# Altium PCB MC3PHAC.PcbDoc
Units mm, origin at the board's own origin, x right, y up, seen from the top; angles counter-clockwise.
Board outline 110.36 x 81.66 mm, 2 copper layers (Top Layer, Bottom Layer); 60 components, 0 nets, 193 pads, 18 vias.
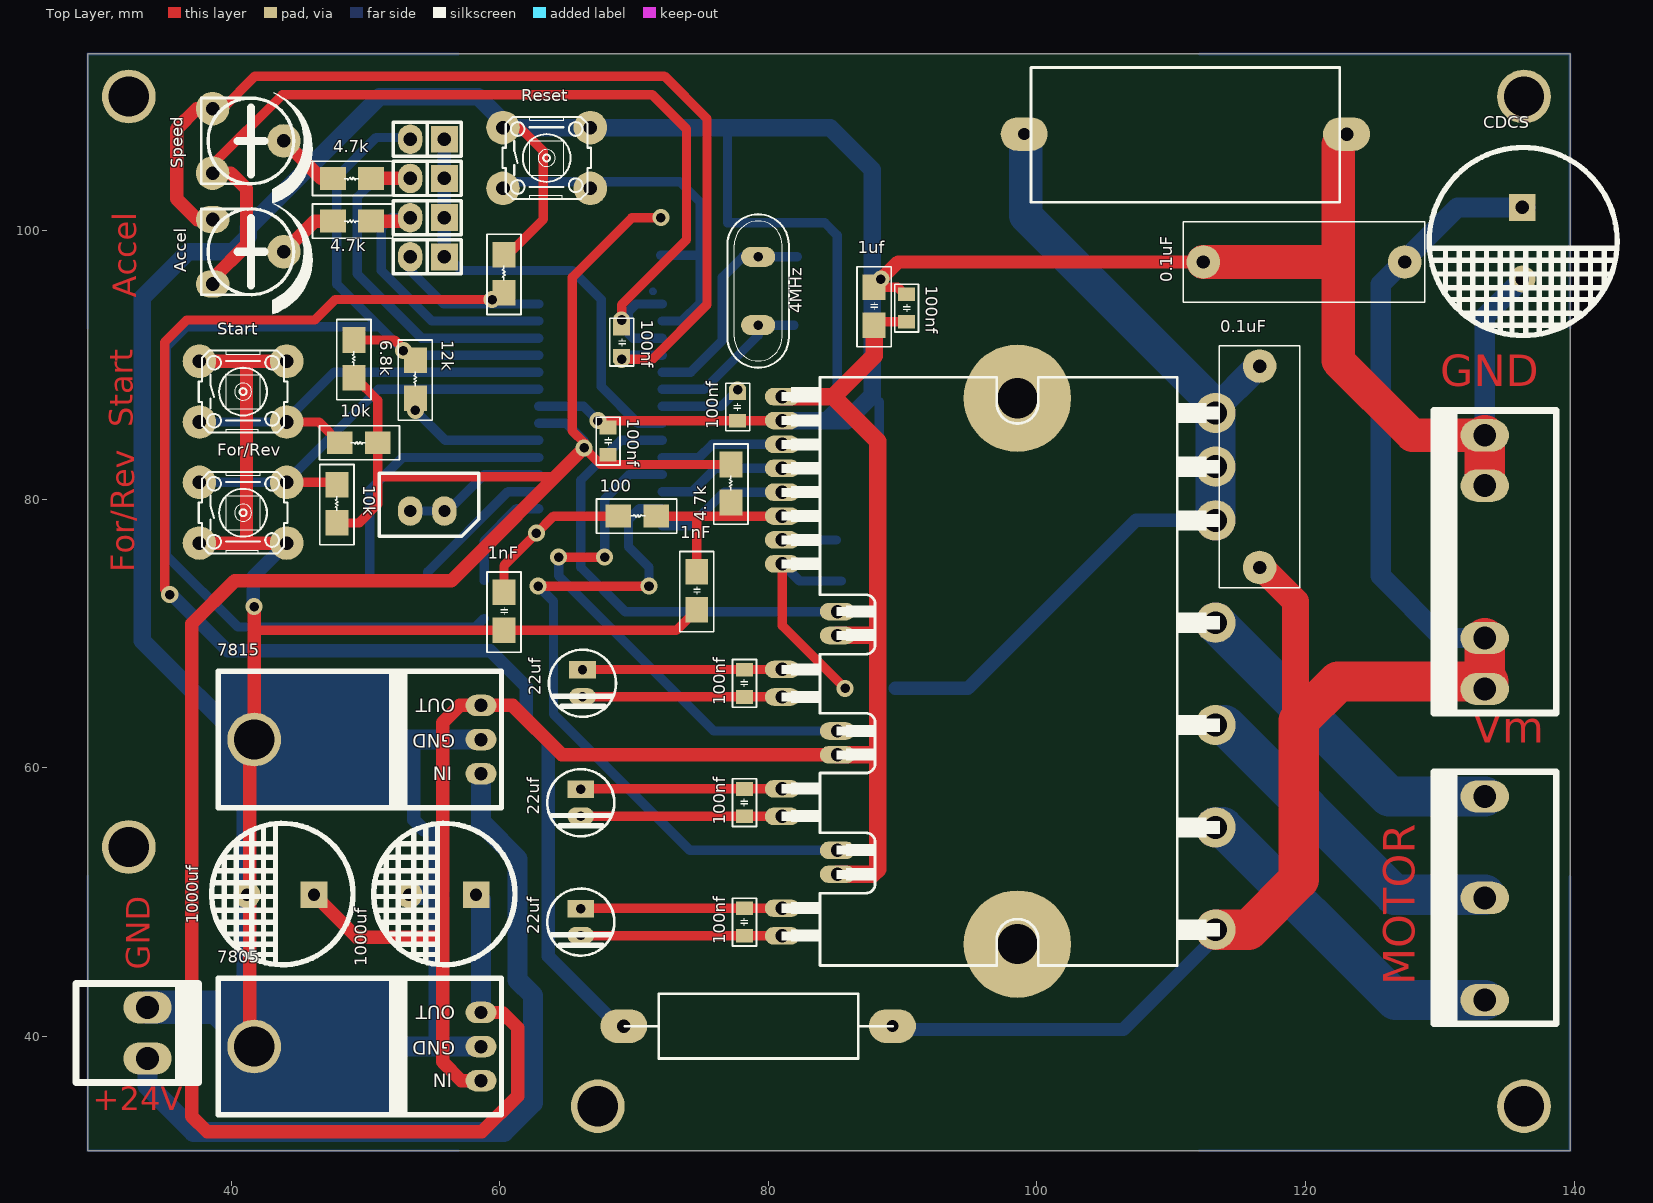
[diagram p0: Top Layer view]
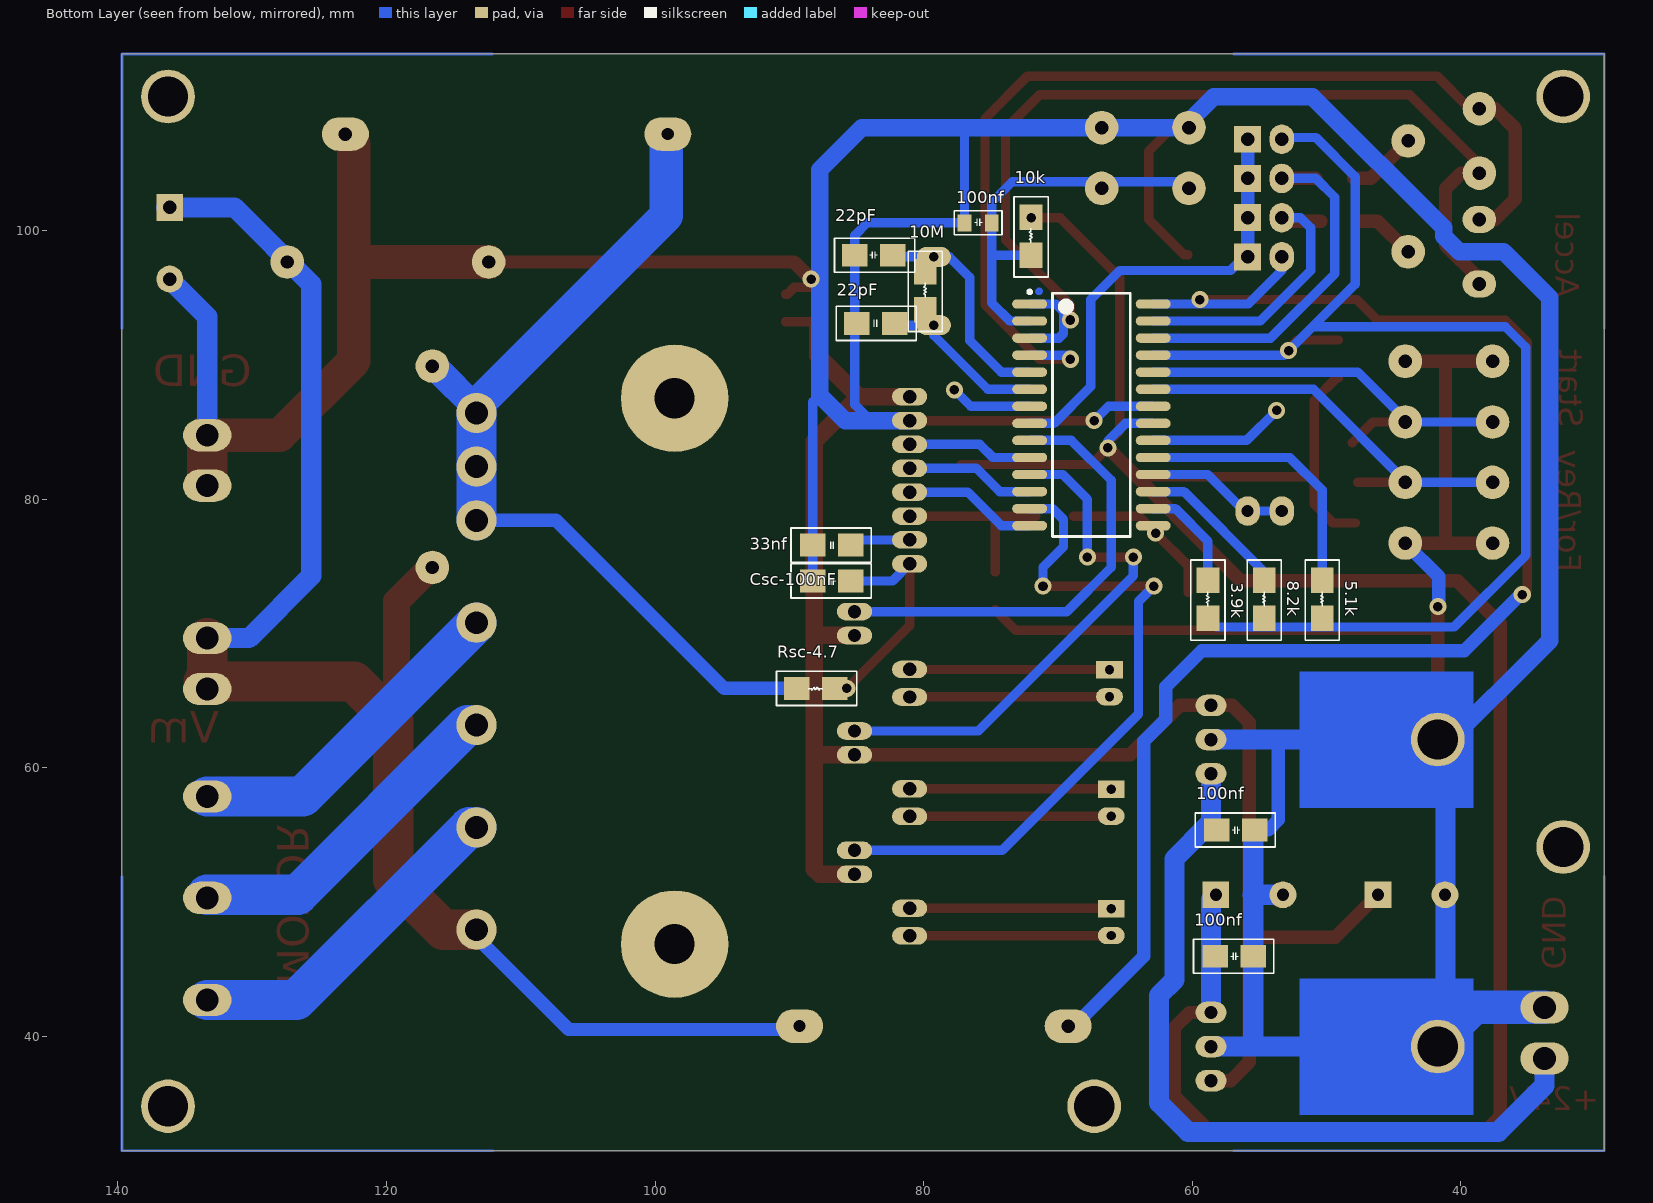
[diagram p1: Bottom Layer view, seen from below]

## Layer stack, top to bottom
Top Solder: solder mask 0.0102, Solder Resist, Dk 3.5
Top Layer: signal copper 0.0356
Dielectric 1: dielectric 0.32, FR-4, Dk 4.8
Bottom Layer: signal copper 0.0356
Bottom Solder: solder mask 0.0102, Solder Resist, Dk 3.5

## Board outline
29.337,31.496 29.337,113.157 139.7,113.157 139.7,31.496

## Design rules (kind name [scope] priority, off if disabled: settings)
Clearance [All] p1: gap=0.254
PolygonConnect [All] p1: connectstyle=Relief reliefconductorwidth=0.254 reliefentries=4 polygonreliefangle="90 Angle" airgapwidth=0.254
RoutingVias [All] p1: holewidth=0.711 width=1.27 viastyle="Through Hole" minholewidth=0.711 minwidth=1.27 maxholewidth=0.711 maxwidth=1.27
SolderMaskExpansion [All] p1: expansion=0.102
Width [All] p1: maxlimit=0.254 minlimit=0.254 preferedwidth=0.254
29 further rules are at their usual default settings.

## Components (designator, comment, footprint, x,y, rotation, side; value= is the part's Value field where it differs from the comment)
0.1uF "Comment" "CAP POL 15mm" 112.395,97.663 r0 top
0.1uF "Comment" "CAP POL 15mm" 116.586,89.916 r270 top
1nF "Comment" "CAP SMD 0805 & 1206" 60.325,70.231 r90 top
1nF "Comment" "CAP SMD 0805 & 1206" 74.676,71.755 r90 top
1uf "Comment" "CAP SMD 0805 & 1206" 87.884,92.964 r90 top
3.9k "Comment" "Res SMD 0805 & 1206" 58.841,71.12 r270 bottom
4.7k "Comment" "Res SMD 0805 & 1206" 77.216,79.756 r270 top
4.7k "Comment" "Res SMD 0805 & 1206" 50.419,100.711 r0 top
4.7k "Comment" "Res SMD 0805 & 1206" 50.419,103.886 r0 top
4MHz "Comment" XTAL 79.248,95.504 r90 top
5.1k "Comment" "Res SMD 0805 & 1206" 50.332,71.12 r270 bottom
6.8k "Comment" "Res SMD 0805 & 1206" 49.149,89.027 r270 top
8.2k "Comment" "Res SMD 0805 & 1206" 54.65,71.12 r270 bottom
10k "Comment" "Res SMD 0805 & 1206" 47.879,78.232 r270 top
10k "Comment" "Res SMD 0805 & 1206" 50.927,84.201 r0 top
10k "Comment" "Res SMD 0805 & 1206" 72.009,98.171 r270 bottom
10M "Comment" "Res SMD 0805 & 1206" 79.883,94.107 r270 bottom
12k "Comment" "Res SMD 0805 & 1206" 53.721,87.503 r270 top
22pF "Comment" "CAP SMD 0805 & 1206" 82.296,98.171 r0 bottom
22pF "Comment" "CAP SMD 0805 & 1206" 82.169,93.091 r0 bottom
22uf "Comment" "CAP 5MM" 66.167,66.294 r90 top
22uf "Comment" "CAP 5MM" 66.04,57.404 r90 top
22uf "Comment" "CAP 5MM" 66.04,48.514 r90 top
33nf "Comment" "CAP SMD 0805 & 1206" 88.265,76.581 r180 bottom
100 "Comment" "Res SMD 0805 & 1206" 68.834,78.74 r180 top
100nf "Comment" "CAP SMD 0805" 68.072,83.312 r90 top
100nf "Comment" "CAP SMD 0805" 78.232,67.31 r270 top
100nf "Comment" "CAP SMD 0805" 78.232,58.42 r270 top
100nf "Comment" "CAP SMD 0805" 78.232,49.53 r270 top
100nf "Comment" "CAP SMD 0805 & 1206" 58.166,55.372 r180 bottom
100nf "Comment" "CAP SMD 0805 & 1206" 58.293,45.974 r180 bottom
100nf "Comment" "CAP SMD 0805" 74.93,100.584 r0 bottom
100nf "Comment" "CAP SMD 0805" 77.724,87.884 r270 top
100nf "Comment" "CAP SMD 0805" 69.088,90.678 r90 top
100nf "Comment" "CAP SMD 0805" 90.297,93.218 r90 top
1000uf "Comment" "CAP 10MM" 43.688,50.546 r90 top
1000uf "Comment" "CAP 10MM" 55.753,50.546 r90 top
7805 "Comment" REG-SLEEP 50.165,39.243 r0 top
7815 "Comment" REG-SLEEP 50.165,62.103 r0 top
Accel "Comment" POT#1 41.275,98.425 r270 top
CDCS "Comment" "CAP 14MM" 136.144,99.06 r180 top
Csc-100nF "Comment" "CAP SMD 0805 & 1206" 88.265,73.914 r180 bottom
For/Rev "Comment" SW-4PIN-Small 40.894,78.994 r0 top
Reset "Comment" SW-4PIN-Small 63.5,105.41 r0 top
Rsc-4.7 "Comment" "Res SMD 0805 & 1206" 86.614,65.913 r180 bottom
Speed "Comment" POT#2 41.275,106.68 r270 top
Start "Comment" SW-4PIN-Small 40.894,88.011 r0 top
? "Comment" "RES 5W" 99.06,107.188 r0 top
? "Comment" "PIN PWR 5" 133.35,50.292 r90 top
? "Comment" "PIN PWR 6" 133.35,75.311 r90 top
? "Comment" "PIN PWR 2" 33.782,40.259 r270 top
? "Comment" "Pin gerd 2pin" 54.61,79.121 r270 top
? "Comment" "RES 2W" 79.248,40.767 r180 top
? "Comment" "Res SMD 0805 & 1206" 60.325,95.377 r270 top
? "Comment" FSBB30CH60C 97.155,67.564 r0 top
? "Comment" MC3PHAC(SOIC-28) 67.464,86.233 r180 bottom
? "Comment" "HEADER 2" 55.88,106.807 r0 top
? "Comment" "HEADER 2" 55.88,103.886 r0 top
? "Comment" "HEADER 2" 55.88,100.965 r0 top
? "Comment" "HEADER 2" 55.88,98.044 r0 top

## Footprints (in the part's own frame and the unit in brackets; to place one, negate y for a bottom-side part, rotate by r counter-clockwise, add the part's x,y. Pads: shape width x height; smd on the part's side, far side on the other; paste and mask are expansions set on the pad)
"CAP 5MM" [mm]
  oval 1.3x2 hole 0.7: 1(-1,0)
  rect 1.3x2 hole 0.7: 2(1,0)
  silkscreen extent -2.5,-2.5 2.5,2.5
"CAP 10MM" [mm] "CAP"
  rect 2x2 hole 0.9: +(0,-2.5)
  round 2 hole 0.9: -(0,2.5)
  silkscreen extent -5.21,-5.39 5.32,5.13
"CAP 14MM" [mm]
  rect 2x2 hole 1: +(0,-2.667)
  round 2 hole 1: -(0,2.667)
  silkscreen extent -7.07,-7.13 6.93,6.87
"CAP POL 15mm" [mm]
  round 2.5 hole 1: 1(0,0) 2(15,0)
  silkscreen extent -1.5,-3 16.5,3
"CAP SMD 0805" [mil]
  rect 40x50 smd: 1(0,0) 2(80,0)
  silkscreen extent -30,-35 110,35
"CAP SMD 0805 & 1206" [mm]
  rect 1.9x1.7 smd: 1(0,0) 2(2.829,0)
  silkscreen extent -1.62,-1.27 4.35,1.27
FSBB30CH60C [mm]
  round 8 hole 3: 0(1.4,-20.69) 0(1.4,19.95)
  oval 2.616x1.308 hole 1: 1:Vcc(-16.1,20.07) 2:COM(-16.1,18.292) 3:IN(UL)(-16.1,16.514) 4:IN(VL)(-16.1,14.736) 5:IN(WL)(-16.1,12.958) 6:VFO(-16.1,11.18) 7:CFOD(-16.1,9.402) 8:CSC(-16.1,7.624) 9:IN(UH)(-12,4.068) 10:Vcc(H)(-12,2.29) 11:VB(U)(-16.1,-0.24) 12:VS(U)(-16.1,-2.29) 13:IN(VH)(-12,-4.822) 14:VCC(H)(-12,-6.6) 15:VB(V)(-16.1,-9.13) 16:VS(V)(-16.1,-11.18) 17:IN(WH)(-12,-13.712) 18:Vcc(H)(-12,-15.49) 19:VB(W)(-16.1,-18.02) 20:VS(W)(-16.1,-20.07)
  round 3 hole 1.7: 21:NU(16.15,18.864) 22:NV(16.15,14.863) 23:NW(16.15,10.863) 24:U(16.15,3.243) 25:V(16.15,-4.377) 26:W(16.15,-11.997) 27:P(16.15,-19.617)
  silkscreen extent -16.17,-22.28 16.5,21.52
"HEADER 2" [mm]
  rect 2x2 hole 1: 1(0,0)
  oval 1.8x2.2 hole 1: 2(-2.54,0)
  silkscreen extent -3.81,-1.27 1.27,1.27
MC3PHAC(SOIC-28) [mm]
  oval 2.6x0.7 smd: 1:VREF(-4.65,8.305) 2:RESET(-4.65,7.035) 3:VDDA(-4.65,5.765) 4:VSSA(-4.65,4.495) 5:OSC2(-4.65,3.225) 6:OSC1(-4.65,1.955) 7:PLLCAP(-4.65,0.685) 8:PWMPOL_BASEFREQ(-4.65,-0.585) 9:PWM_U_TOP(-4.65,-1.855) 10:PWM_U_BOT(-4.65,-3.125) 11:PWM_V_TOP(-4.65,-4.395) 12:PWM_V_BOT(-4.65,-5.665) 13:PWM_W_TOP(-4.65,-6.935) 14:PWM_W_BOT(-4.65,-8.205) 15:FAULTIN(4.55,-8.205) 16:PWMFREQ_RxD(4.55,-6.935) 17:RETRY_TxD(4.55,-5.665) 18:RBRAKE(4.55,-4.395) 19:DT_FAULTOUT(4.55,-3.125) 20:VBOOST_MODE(4.55,-1.855) 21:VDD(4.55,-0.585) 22:VSS(4.55,0.685) 23:FWD(4.55,1.955) 24:START(4.55,3.225) 25:MUX_IN(4.55,4.495) 26:SPEED(4.55,5.765) 27:ACCEL(4.55,7.035) 28:DC_BUS(4.55,8.305)
  Top Layer circle w0.254: c-3.95,9.24 r0.158
  silkscreen extent -4.77,-9.01 2.85,9.33
"Pin gerd 2pin" [mm]
  oval 2.2x1.8 hole 0.9: 1(0,1.27) 1(0,-1.27)
  silkscreen extent -2.82,-3.57 1.88,3.85
"PIN PWR 2" [mm] "2PIN"
  oval 2.4x3.6 hole 1.7: 1(-1.9,0) 2(1.9,0)
  silkscreen extent -3.68,-5.33 3.69,3.8
"PIN PWR 5" [mm]
  oval 2.4x3.6 hole 1.7: 1(-7.575,0) 3(0.025,0) 5(7.575,0)
  silkscreen extent -9.35,-5.33 9.43,3.8
"PIN PWR 6" [mm]
  oval 2.4x3.6 hole 1.7: 1(-9.45,0) 2(-5.65,0) 5(5.7,0) 6(9.45,0)
  silkscreen extent -11.23,-5.33 11.3,3.8
POT#1 [mm]
  oval 2x2.5 hole 1.016: 1(-2.4,-2.65) 2(2.4,-2.65)
  round 2.5 hole 1.016: 3(0,2.65)
  silkscreen extent -3.58,-3.5 4.61,4.75
POT#2 [mm]
  round 2.5 hole 1.016: 1(-2.4,-2.65) 2(2.4,-2.65) 3(0,2.65)
  silkscreen extent -3.58,-3.5 4.61,4.75
REG-SLEEP [mm]
  round 4 hole 3: GND(-8.445,0)
  oval 2.3x1.6 hole 1: GND(8.445,0) IN(8.445,-2.54) OUT(8.445,2.54)
  Bottom Layer region: 1.841,-5.08 1.841,5.08 -11.112,5.08 -11.112,-5.08
  silkscreen extent -11.11,-5.08 9.97,5.08
"RES 2W" [mm]
  oval 3.5x2.5 hole 0.9: 1(-10,0)
  oval 3.5x2.5 hole 1: 2(10,0)
  silkscreen extent -10,-2.41 9.94,2.41
"RES 5W" [mm]
  oval 3.5x2.5 hole 0.9: 1(0,0)
  oval 3.5x2.5 hole 1: 2(24,0)
  silkscreen extent 0.5,-5.08 23.5,4.95
"Res SMD 0805 & 1206" [mm]
  rect 1.9x1.7 smd: 1(0,0) 2(-2.829,0)
  silkscreen extent -4.35,-1.27 1.62,1.27
SW-4PIN-Small [mil]
  round 98.43 hole 40: 1(-128,89) 1(128,89) 2(-128,-89) 2(128,-89)
  silkscreen extent -130,-120 130,120
XTAL [mm] "XTAL"
  oval 1.5x2.54 hole 0.7: 1(-2.54,0) 2(2.54,0)
  silkscreen extent -5.71,-2.29 5.71,2.29

## Free pads (board coordinates)
  round 4 hole 3: 0(32.385,54.102) 0(32.385,109.982) 0(67.31,34.798) 0(136.271,34.798) 0(136.271,109.982)

## Via types
v1: diameter 1.27, hole 0.711, Top Layer to Bottom Layer, 18 vias

## Nets (pads, with @x,y where several pads share a name; then routed paths per layer and width w, separated by ;. In a path a pad name is that pad's centre, name@x,y a point inside that pad or via, vN(x,y) a via of type N, cw(c..) or ccw(c..) an arc to the next point about the centre after c; other vN are vias at no path point)
pads on no net: 0.1uF.1 0.1uF.2 1nF.1 1nF.2 1uf.1 1uf.2 3.9k.1 3.9k.2 4.7k.1 4.7k.2 4MHz.1 4MHz.2 5.1k.1 5.1k.2 6.8k.1 6.8k.2 8.2k.1 8.2k.2 10k.1 10k.2 10M.1 10M.2 12k.1 12k.2 22pF.1 22pF.2 22uf.1 22uf.2 33nf.1 33nf.2 100.1 100.2 100nf.1 100nf.2 1000uf.+ 1000uf.- 7805.GND 7805.IN 7805.OUT 7815.GND 7815.IN 7815.OUT ?.0 ?.1 ?.1:Vcc ?.1:VREF ?.2 ?.2:COM ?.2:RESET ?.3 ?.3:IN(UL) ?.3:VDDA ?.4:IN(VL) ?.4:VSSA ?.5 ?.5:IN(WL) ?.5:OSC2 ?.6 ?.6:OSC1 ?.6:VFO ?.7:CFOD ?.7:PLLCAP ?.8:CSC ?.8:PWMPOL_BASEFREQ ?.9:IN(UH) ?.9:PWM_U_TOP ?.10:PWM_U_BOT ?.10:Vcc(H) ?.11:PWM_V_TOP ?.11:VB(U) ?.12:PWM_V_BOT ?.12:VS(U) ?.13:IN(VH) ?.13:PWM_W_TOP ?.14:PWM_W_BOT ?.14:VCC(H) ?.15:FAULTIN ?.15:VB(V) ?.16:PWMFREQ_RxD ?.16:VS(V) ?.17:IN(WH) ?.17:RETRY_TxD ?.18:RBRAKE ?.18:Vcc(H) ?.19:DT_FAULTOUT ?.19:VB(W) ?.20:VBOOST_MODE ?.20:VS(W) ?.21:NU ?.21:VDD ?.22:NV ?.22:VSS ?.23:FWD ?.23:NW ?.24:START ?.24:U ?.25:MUX_IN ?.25:V ?.26:SPEED ?.26:W ?.27:ACCEL ?.27:P ?.28:DC_BUS Accel.1 Accel.2 Accel.3 CDCS.+ CDCS.- Csc-100nF.1 Csc-100nF.2 For/Rev.1 For/Rev.2 Reset.1 Reset.2 Rsc-4.7.1 Rsc-4.7.2 Speed.1 Speed.2 Speed.3 Start.1 Start.2
copper on no net: | length 2239.7
  Top Layer w0.7: v1(35.433,72.898) 35.052,73.279 35.052,91.694 36.703,93.345 46.228,93.345 47.752,94.869 v1(59.436,94.869) ; 38.625,104.28 38.625,104.919 43.815,110.109 71.374,110.109 73.914,107.569 73.914,99.314 69.088,94.488 v1(69.088,93.345) ; 38.625,109.08 39.357,109.08 41.783,111.506 72.263,111.506 75.438,108.331 75.438,94.488 71.374,90.424 v1(69.088,90.424) ; 41.846,70.231 60.325,70.231 73.152,70.231 74.676,71.755 ; 44.145,81.255 47.685,81.255 ; 44.145,85.75 46.549,85.75 48.098,84.201 ; 47.879,78.232 49.53,78.232 50.927,79.629 50.927,84.201 50.927,87.376 49.276,89.027 49.149,89.027 ; 49.149,91.856 52.162,91.856 52.832,91.186 v1(52.832,91.059) ; 50.927,81.661 64.135,81.661 v1(66.294,83.82) ; 60.249,107.671 61.493,107.671 63.246,105.918 63.246,100.838 60.614,98.206 60.325,98.206 ; 60.325,73.06 60.325,75.057 v1(62.738,77.47) 64.012,78.744 68.834,78.744 ; v1(62.865,73.533) v1(71.12,73.533) ; v1(64.389,75.692) v1(67.818,75.692) ; 66.04,56.404 81.035,56.404 ; 66.044,47.494 81.055,47.494 ; 66.054,49.544 81.055,49.544 ; 66.07,58.434 81.055,58.434 ; 66.167,65.294 81.035,65.294 ; 66.197,67.324 81.055,67.324 ; v1@67.31,85.856 81.055,85.856 ; 71.663,78.744 81.055,78.744 ; v1(72.009,100.965) 69.85,100.965 65.405,96.52 65.405,85.09 66.294,84.201 v1(66.294,83.82) ; 74.676,74.584 74.676,78.744 ; 77.216,82.585 67.529,82.585 v1(66.294,83.82) ; 81.055,75.188 81.055,70.583 v1(85.725,65.913) ; 87.884,93.218 90.297,93.218 ; 87.884,95.793 89.627,95.793 90.17,95.25 90.297,95.25
  Top Layer w1: 37.643,76.733 44.145,76.733 ; 37.643,90.272 44.145,90.272 ; 38.625,96.025 38.625,96.41 41.148,98.933 41.148,103.124 39.992,104.28 38.625,104.28 ; 38.625,100.825 37.478,100.825 35.941,102.362 35.941,107.569 37.452,109.08 38.625,109.08 ; 41.148,76.733 41.148,90.272 ; 41.402,39.37 41.402,61.785 42.672,63.055 ; 41.719,62.103 v1(41.719,72.009) ; 43.925,98.425 46.211,100.711 47.59,100.711 ; 43.925,106.68 46.719,103.886 47.971,103.886 ; 46.188,50.546 49.363,47.371 55.753,47.371 ; 50.419,100.711 52.959,100.711 ; 50.8,103.886 53.34,103.886 ; 58.61,36.703 57.15,36.703 55.753,38.1 55.753,63.373 57.023,64.643 58.61,64.643 60.96,64.643 64.639,60.964 85.155,60.964 ; 58.801,41.783 58.61,41.783 60.198,41.783 61.341,40.64 61.341,35.56 58.674,32.893 38.227,32.893 37.084,34.036 37.084,70.739 40.259,73.914 56.388,73.914 v1(66.294,83.82) ; v1(88.392,96.393) 89.662,97.663 112.395,97.663
  Top Layer w1.3: 81.055,87.634 84.832,87.634 ; 85.155,52.074 87.761,52.074 88.138,52.451 88.138,84.328 84.832,87.634 ; 85.155,60.964 88.134,60.964 ; 85.155,69.854 88.015,69.854 ; 87.884,92.964 87.884,90.687 84.832,87.634
  Top Layer w2: 116.586,74.916 116.727,74.916 119.253,72.39 119.253,62.738
  Top Layer w2.5: 112.395,97.663 122.174,97.663 ; 123.06,107.061 122.428,106.429 122.428,90.297 127.964,84.761 133.35,84.761
  Top Layer w3: 113.305,47.947 115.765,47.947 119.507,51.689 119.507,63.5 122.428,66.421 133.604,66.421 ; 133.35,66.929 133.35,69.661 ; 133.35,81.407 133.35,84.761
  Bottom Layer w0.2: 29.337,51.911 29.337,31.496 56.928,31.496 ; 29.337,92.742 29.337,113.157 56.928,113.157 ; 112.109,31.496 139.7,31.496 139.7,51.911 ; 112.109,113.157 139.7,113.157 139.7,92.742
  Bottom Layer w0.7: 37.643,81.255 44.044,81.255 50.977,88.188 62.914,88.188 ; 37.643,85.75 43.967,85.75 47.675,89.458 62.914,89.458 ; 50.332,73.949 50.332,80.685 52.755,83.108 62.914,83.108 ; 50.927,92.837 36.703,92.837 35.179,91.313 35.179,75.819 40.513,70.485 58.206,70.485 58.841,71.12 ; 53.213,106.934 50.8,106.934 47.879,104.013 47.879,96.012 53.163,90.728 62.914,90.728 ; 53.34,79.121 56.134,79.121 58.851,81.838 62.914,81.838 ; 53.34,98.044 53.34,97.028 55.83,94.538 62.914,94.538 ; 53.34,100.965 51.943,100.965 51.181,100.203 51.181,97.028 54.941,93.268 62.914,93.268 ; 53.34,103.886 50.8,103.886 49.403,102.489 49.403,96.774 54.179,91.998 62.914,91.998 ; v1(53.721,86.614) 55.957,84.378 62.914,84.378 ; 54.65,73.949 54.65,74.589 60.629,80.568 62.914,80.568 ; 56.007,98.171 57.15,97.028 65.405,97.028 67.564,94.869 67.564,88.392 70.308,85.648 72.114,85.648 ; 58.841,73.949 58.841,76.875 61.264,79.298 62.914,79.298 ; 60.452,103.378 60.706,103.632 73.406,103.632 74.93,102.108 74.93,100.584 74.93,94.615 73.583,93.268 72.114,93.268 ; v1(62.865,73.533) 64.008,72.39 64.008,64.008 74.164,53.852 85.155,53.852 ; 62.914,85.648 64.974,85.648 66.294,84.328 v1(66.294,83.82) ; 62.914,86.918 66.244,86.918 v1(67.31,85.852) ; v1(64.389,75.692) 64.389,74.295 75.942,62.742 85.155,62.742 ; v1(67.818,75.692) 67.818,80.01 69.646,81.838 72.114,81.838 ; v1@69.138,90.728 72.114,90.728 ; v1(71.12,73.533) 71.12,74.93 69.596,76.454 69.596,78.486 70.408,79.298 72.114,79.298 ; 72.009,98.171 74.93,98.171 ; 72.114,78.028 74.218,78.028 76.712,80.522 81.055,80.522 ; 72.114,80.568 74.345,80.568 76.077,82.3 81.055,82.3 ; 72.114,83.108 74.853,83.108 75.823,84.078 81.055,84.078 ; 72.114,84.378 69.011,84.378 66.04,81.407 66.04,74.93 69.338,71.632 85.155,71.632 ; 72.114,86.918 76.504,86.918 v1@77.47,87.884 ; 72.114,88.188 75.234,88.188 79.248,92.202 79.248,92.964 81.915,92.964 ; 72.114,89.458 74.218,89.458 76.581,91.821 76.581,96.52 78.105,98.044 79.248,98.044 82.169,98.044 ; 72.114,91.998 69.927,91.998 69.596,92.329 69.596,93.98 70.154,94.538 72.114,94.538 ; 76.962,107.569 76.962,100.584 84.201,100.584 85.125,99.66 85.125,98.171 85.125,87.03 83.951,85.856 81.055,85.856 ; 81.055,75.188 82.33,73.914 85.436,73.914 ; 81.055,76.966 85.051,76.966 ; 87.757,87.757 88.265,87.249 88.265,73.914
  Bottom Layer w1: v1@35.496,72.962 39.751,68.707 59.309,68.707 61.976,66.04 61.976,63.627 63.627,61.976 63.627,45.974 68.834,40.767 69.248,40.767 ; 41.529,61.341 41.529,62.992 ; v1@41.656,72.009 41.656,74.244 44.145,76.733 ; 53.594,62.103 53.594,56.134 54.356,55.372 55.337,55.372 ; 54.229,62.103 54.289,62.163 ; 55.88,98.044 55.88,106.807 ; 58.61,55.435 58.61,59.563 ; 89.443,65.913 94.869,65.913 107.383,78.427 113.305,78.427 ; 89.662,40.513 106.426,40.513 113.305,47.392 113.305,47.947
  Bottom Layer w1.3: 41.529,61.341 33.401,69.469 33.401,94.996 36.83,98.425 40.132,98.425 41.275,99.568 41.275,100.203 51.054,109.982 58.42,109.982 60.731,107.671 84.607,107.671 87.757,104.521 87.757,87.757 85.856,85.856 81.055,85.856
  Bottom Layer w1.5: 33.782,38.359 33.782,36.322 37.211,32.893 60.325,32.893 62.484,35.052 62.484,43.053 61.341,44.196 61.341,53.213 58.801,55.753 ; 41.148,39.243 41.148,62.103 ; 41.529,62.103 58.61,62.103 ; 41.719,39.243 58.61,39.243 ; 53.253,50.546 55.499,50.546 ; 55.464,39.335 55.464,45.974 55.464,55.245 ; 58.61,41.783 58.61,45.529 58.61,50.188 ; 58.61,55.753 58.61,59.436 ; 133.35,69.661 130.237,69.661 125.603,74.295 125.603,96.012 131.318,101.727 136.398,101.727 ; 133.35,84.761 133.35,93.599 136.144,96.393
  Bottom Layer w2: 113.305,86.428 113.305,86.762 116.332,89.789
  Bottom Layer w2.5: 33.782,42.159 38.994,42.159 41.529,39.624 ; 99.187,107.061 99.187,101.092 113.305,86.974 113.305,86.428
  Bottom Layer w3: 113.305,55.567 113.851,55.567 126.701,42.717 133.35,42.717 ; 113.305,70.807 126.245,57.867 133.35,57.867 ; 113.305,78.427 113.305,86.428 ; 113.978,63.187 126.619,50.546 133.35,50.546
  other v1: 77.724,88.138

## Other copper
Top Layer:
  text "Accel" at 33.528,94.996 h3 r90
  text "GND" at 130.048,87.63 h4
  text "Start" at 33.274,85.344 h3 r90
  text "For/Rev" at 33.401,74.549 h3 r90
  text "Vm" at 132.461,61.087 h4
  text "GND" at 34.544,44.958 h3 r90
  text "MOTOR" at 128.905,43.815 h4 r90
  text "+24V" at 29.718,33.909 h3

## Text inside footprints (layer, text, board x,y; h text height)
7805: Top Overlay "IN" at 56.451,37.211 h1 r180; Top Overlay "GND" at 56.706,39.624 h1 r180; Top Overlay "OUT" at 56.706,42.291 h1 r180
7815: Top Overlay "IN" at 56.451,60.071 h1 r180; Top Overlay "GND" at 56.706,62.484 h1 r180; Top Overlay "OUT" at 56.706,65.151 h1 r180